# Allegro board ESP32.brd
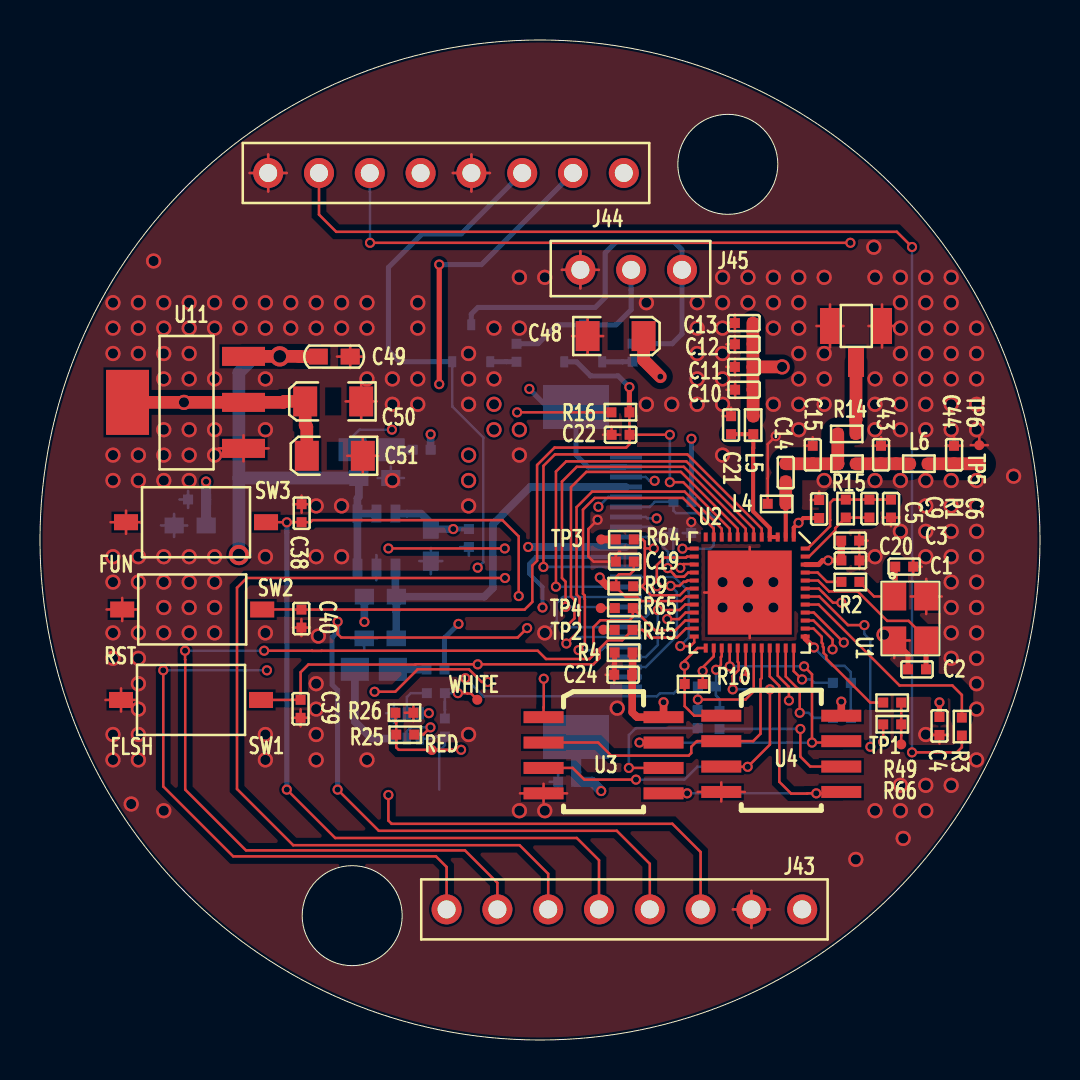
[diagram p0: board, top side]
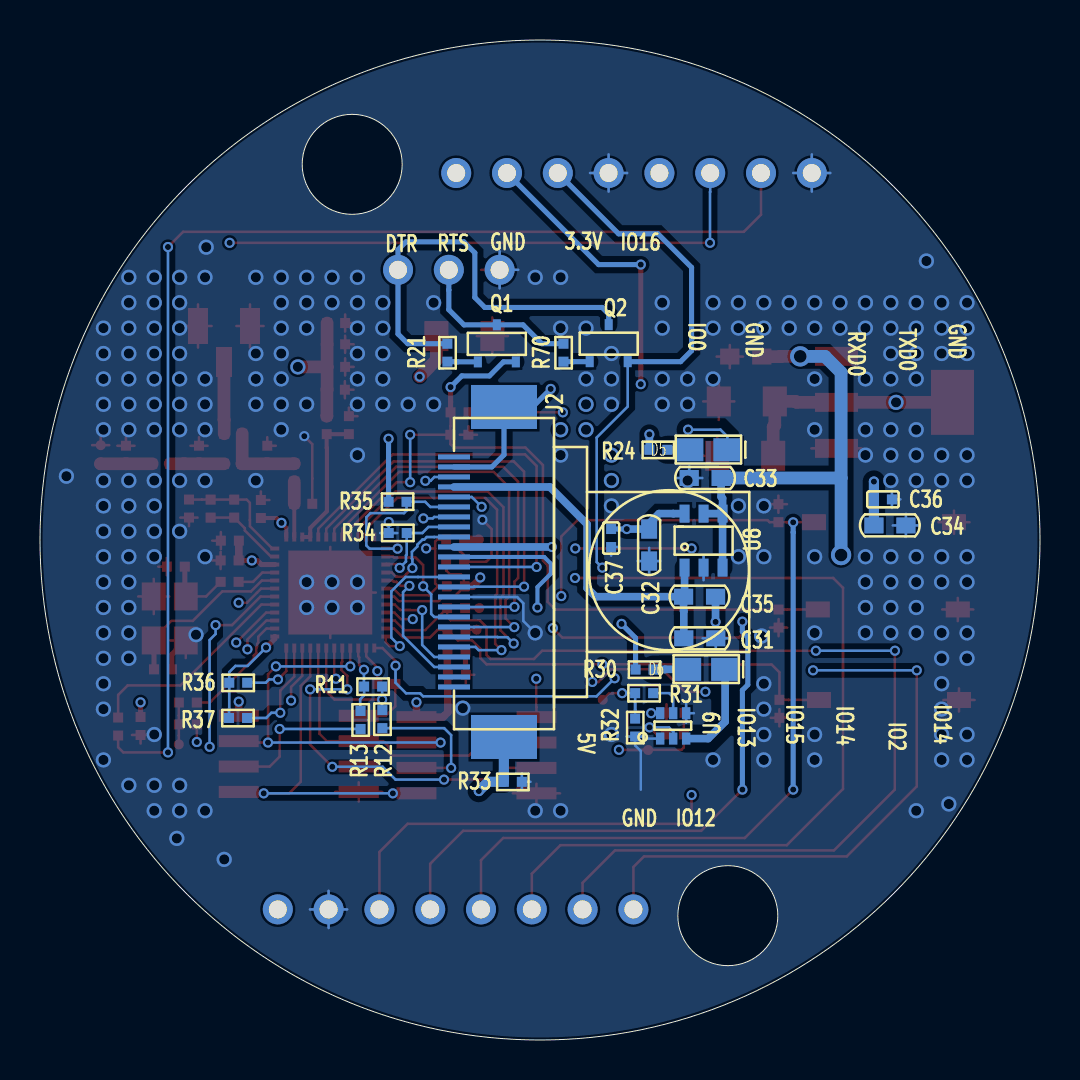
[diagram p1: board, bottom side, seen from below]

Outline 50 x 50 mm; copper layers: TOP, GND, SIG, BOTTOM. Coordinates in mm from the lower left corner of the outline.
Outline path: circle c15.61,6.22 r2.5 ; circle c25,25 r25 ; circle c34.39,43.78 r2.5

## Design rules (mm)
net group DTR: nets DTR N16908429
net group IO21: nets IO21 N16845223
net group IO22: nets IO22 N16845342
net group RTS: nets N16908427 RTS
net group RF: nets N16845246 N16845248 N16845297 N16845299 N16860839 N16860948 N16861170 N16861179 N16861214 N16861260 N16861530 N16861598 N16861944 N16863419 N16863538 N16884685 N16926532

## Placement (name value [footprint] x y rotation side)
C1  22pF/6.3V(10%)  [C0402]  42.76 23.67 0 top
C2  22pF/6.3V(10%)  [C0402]  44.3 18.53 180 top
C3  100pF/6.3V(10%)  [C0402]  40.06 24.97 0 top
C4  0.1uF/6.3V(10%)  [C0402]  44.97 16.15 270 top
C5  10nF/6.3V(10%)  [C0402]  42.55 27.02 270 top
C6  3.3nF/6.3V(10%)  [C0402]  41.47 26.12 90 top
C9  0.1uF/6.3V(10%)  [C0402]  38.96 26.1 90 top
C10  0.1uF/6.3V(10%)  [C0402]  35.66 32.51 180 top
C11  1uF/10V(20%)  [C0402]  35.65 33.65 180 top
C12  10uF/6.3V(20%)  [C0402]  35.65 34.79 180 top
C13  10uF/6.3V(20%)  [C0402]  35.65 35.85 180 top
C14  6.8pF  [C0402]  37.29 27.92 90 top
C15  2.4pF  [C0402]  38.64 29.71 270 top
C19  0.1uF/6.3V(10%)  [C0402]  29.69 23.92 180 top
C20  1uF/10V(20%)  [C0402]  40.07 23.98 0 top
C21  NC  [C0402]  34.55 30.29 90 top
C22  1uF/10V(20%)  [C0402]  29.48 30.26 180 top
C24  1uF/10V(20%)  [C0402]  29.61 18.26 180 top
C31  10uF/10V(20%)  [C0603]  16.21 20.08 0 bottom
C32  10uF/10V(20%)  [C0603]  19.54 23.95 90 bottom
C33  10uF/10V(20%)  [C0603]  17.54 28.1 180 bottom
C34  4.7uF/10V(20%)  [C0603]  8.3 25.73 180 bottom
C35  4.7uF/10V(20%)  [C0603]  17.82 22.17 180 bottom
C36  0.1uF/16V(10%)  [C0402]  8.3 27.03 180 bottom
C37  1uF/10V(20%)  [C0402]  21.44 25.55 270 bottom
C38  0.1uF/16V(10%)  [C0402]  13.08 26.79 270 top
C39  0.1uF/16V(10%)  [C0402]  13.03 16.11 90 top
C40  0.1uF/16V(10%)  [C0402]  13.07 20.62 90 top
C43  1.0pF  [C0402]  42.05 29.71 270 top
C44  1.5pF  [C0402]  45.7 29.71 270 top
C48  47uF/6.3V(20%)  [C1206]  30.18 35.2 0 top
C49  10uF/16V  [C0603]  13.91 34.17 0 top
C50  22uF/16V  [C1206]  13.26 31.93 180 top
C51  10uF/16V  [C1206]  13.34 29.21 180 top
D5  RED LED  [LED0805]  17.53 29.51 180 bottom
D6  WHITE LED  [LED0805]  17.64 18.53 180 bottom
J2  FFC_24P_0P5  [OV9650FSL_PCB]  29.3 29.15 90 bottom
J39  IPEX(NC)  [ECT8180001581]  40.8 33.9 0 top
J43  -  [CON8]  20.33 6.53 0 top
J44  -  [CON8]  11.41 43.35 0 top
J45  CON3  [CON_2_54_3P]  27.02 38.51 0 top
L4  2.4nH  [R0402]  37.29 26.81 180 top
L5  2.0nH  [R0402]  35.67 30.29 90 top
L6  2.0nH  [R0402]  43.49 28.81 0 top
Q1  S8050(NPN)  [SOT23-3]  27.16 35.76 180 bottom
Q2  S8050(NPN)  [SOT23-3]  21.56 35.77 180 bottom
R1  20K(5%)  [R0402]  40.29 26.12 90 top
R2  51R(5%)  [R0402]  40.97 22.91 180 top
R3  499R(1%)  [R0402]  46.09 16.12 270 top
R4  2K(5%)(NC)  [R0402]  29.63 19.37 180 top
R9  10K(1%)(NC)  [R0402]  28.76 22.69 0 top
R10  10K(1%)  [R0402]  33.13 17.8 180 top
R11  0R(5%)(NC)  [R0402]  32.89 17.67 0 bottom
R12  0R(5%)  [R0402]  32.88 16.49 270 bottom
R13  0R(5%)  [R0402]  33.97 16.45 270 bottom
R14  0R(5%)  [R0402]  40.79 30.31 180 top
R15  0R(5%)  [R0402]  39.9 28.81 0 top
R16  10K(1%)  [R0402]  28.57 31.38 0 top
R21  12K(1%)  [R0402]  29.63 34.82 270 bottom
R24  1K(1%)  [R0402]  18.63 29.51 0 bottom
R25  1K(1%)  [R0402]  18.71 15.27 180 top
R26  10K(1%)  [R0402]  17.77 16.36 0 top
R30  1K(1%)  [R0402]  19.32 18.52 0 bottom
R31  1K(1%)  [R0402]  19.34 17.34 0 bottom
R32  10K(1%)  [R0402]  20.24 16.07 270 bottom
R33  0R(5%)  [R0402]  25.91 12.91 0 bottom
R34  10K(1%)  [R0402]  32.56 25.35 180 bottom
R35  10K(1%)  [R0402]  32.57 26.91 180 bottom
R36  3.3K(5%)  [R0402]  39.64 17.86 0 bottom
R37  3.3K(5%)  [R0402]  39.65 16.1 0 bottom
R45  0R(5%)  [R0402]  28.73 20.5 0 top
R49  0R(5%)  [R0402]  43.06 16.87 180 top
R64  0R(5%)  [R0402]  28.79 25.03 0 top
R65  0R(5%)  [R0402]  28.74 21.6 0 top
R66  10K(1%)  [R0402]  42.16 15.78 0 top
R70  12K(1%)  [R0402]  23.83 34.82 270 bottom
RED  Red  [TP1]  19.59 14.5 0 top
SW1  SW PUSHBUTTON  [KEY_3X6]  4.05 17 0 top
SW2  SW PUSHBUTTON  [KEY_3X6]  4.11 21.53 0 top
SW3  SW PUSHBUTTON  [KEY_3X6]  4.3 25.89 0 top
TP1  Red  [TP1]  43.06 14.78 0 top
TP2  Red  [TP1]  28.17 20.51 0 top
TP3  Red  [TP1]  28.06 25.03 0 top
TP4  Red  [TP1]  28.04 21.6 0 top
TP5  Red  [TP1]  46.97 28.81 0 top
TP6  Red  [TP1]  46.96 29.74 0 top
U1  40MHz+/-10ppm  [CRY_3225]  44.31 22.18 270 top
U2  ESP32-D0WD  [AC108_QFN48]  37.69 25.15 270 top
U3  FLASH  [RZ7889]  28.26 11.12 0 top
U4  PSRAM  [RZ7889]  37.15 11.19 0 top
U8  RT9011-BM-PJ6  [SOT-23-6]  16.82 24.97 180 bottom
U9  SI1902CDL  [SOT363]  18.99 15.07 180 bottom
U11  TLV1117-33IDCY  [SOT223]  10.18 29.58 90 top
WHITE  Red  [TP1]  21.86 17.01 0 top

## Library data of the parts
C1-C6 C9-C15 C19-C22 C24 C31-C40 C43 C44 C48-C51 = CAP NP
D5 D6 = LED_6
J2 = CON24_4
J39 = IPEX_0
J43 J44 = CON8
J45 = CON3
L4-L6 = CHOKE
Q1 Q2 = NPN BCE
R1-R4 R9-R15 R45 R49 R64-R66 = RESISTOR
R16 = RESISTOR_0: signal model: DEFAULT_RESISTOR_10000OHM_1_2
R21 R24-R26 R30-R32 R34-R37 R70 = RESISTOR_0: signal model: DEFAULT_RESISTOR_200OHM_1_2
R33 = RESISTOR_0
RED TP1-TP6 WHITE = TEST POINT_0
SW1 = SW PUSHBUTTON_0
SW2 SW3 = SW PUSHBUTTON
U1 = X1_1
U2 = ESP8080_24
U3 = FLASH_3
U4 = PN18S32
U8 = NCP1117_3
U9 = D-NMOS_1
U11 = TLV1117-33IDCY

## Footprints (pads in the part's own frame, mm; a bottom-side part is the same pattern mirrored in y, then rotated)
AC108_QFN48
  rect 0.45x0.2 smd: 1(0,0) 2(0,-0.4) 3(0,-0.8) 4(0,-1.2) 5(0,-1.6) 6(0,-2) 7(0,-2.4) 8(0,-2.8) 9(0,-3.2) 10(0,-3.6) 11(0,-4) 12(0,-4.4) 25(5.55,-4.4) 26(5.55,-4) 27(5.55,-3.6) 28(5.55,-3.2) 29(5.55,-2.8) 30(5.55,-2.4) 31(5.55,-2) 32(5.55,-1.6) 33(5.55,-1.2) 34(5.55,-0.8) 35(5.55,-0.4) 36(5.55,0)
  rect 0.2x0.45 smd: 13(0.575,-4.975) 14(0.975,-4.975) 15(1.375,-4.975) 16(1.775,-4.975) 17(2.175,-4.975) 18(2.575,-4.975) 19(2.975,-4.975) 20(3.375,-4.975) 21(3.775,-4.975) 22(4.175,-4.975) 23(4.575,-4.975) 24(4.975,-4.975) 37(4.975,0.575) 38(4.575,0.575) 39(4.175,0.575) 40(3.775,0.575) 41(3.375,0.575) 42(2.975,0.575) 43(2.575,0.575) 44(2.175,0.575) 45(1.775,0.575) 46(1.375,0.575) 47(0.975,0.575) 48(0.575,0.575)
  rect 4.2x4.2 smd: 49(2.775,-2.2)
C0402
  rect 0.5x0.5 smd: 1(0,0) 2(0.9,0)
C0603
  rect 0.96x0.8 smd: 1(0,0) 2(1.6,0)
C1206
  rect 1.2x1.5 smd: 1(0,0) 2(-2.8,0)
CON8
  round 1.5 hole 0.9: 1(0,0) 2(2.54,0) 3(5.08,0) 4(7.62,0) 5(10.16,0) 6(12.7,0) 7(15.24,0) 8(17.78,0)
CON_2_54_3P
  round 1.5 hole 0.9: 1(0,0) 2(2.54,0) 3(5.08,0)
CRY_3225
  rect 1.4x1.2 smd: 1(0,-1.6) 2(2.2,-1.6) 3(2.2,0) 4(0,0)
ECT8180001581
  rect 0.8x1.5 smd: 1(0,0)
  rect 1x1.8 smd: 2(-1.3,1.8) 3(1.3,1.8)
KEY_3X6
  rect 1.2x0.8 smd: 1(0,0) 2(7,0)
LED0805
  rect 1.4x1.15 smd: 1(0,0) 2(1.9,0)
OV9650FSL_PCB
  rect 0.25x1.6 smd: 1(0,0) 2(-0.5,0) 3(-1,0) 4(-1.5,0) 5(-2,0) 6(-2.5,0) 7(-3,0) 8(-3.5,0) 9(-4,0) 10(-4.5,0) 11(-5,0) 12(-5.5,0) 13(-6,0) 14(-6.5,0) 15(-7,0) 16(-7.5,0) 17(-8,0) 18(-8.5,0) 19(-9,0) 20(-9.5,0) 21(-10,0) 22(-10.5,0) 23(-11,0) 24(-11.5,0)
  rect 2.2x3.3 smd: 25(-14,-2.5) 26(2.5,-2.5)
R0402
  rect 0.5x0.5 smd: 1(0,0) 2(0.9,0)
RZ7889
  rect 2x0.6 smd: 1(-3.082,5.025) 2(-3.082,3.755) 3(-3.082,2.485) 4(-3.082,1.215) 5(2.918,1.215) 6(2.918,2.485) 7(2.918,3.755) 8(2.918,5.025)
SOT23-3
  rect 0.4x0.55 smd: 1(-0.95,-1.85) 2(0.95,-1.85) 3(0,0)
SOT223
  rect 0.95x2.15 smd: 1(0,0) 2(2.3,0) 3(4.6,0)
  rect 3.25x2.15 smd: 4(2.3,5.8)
SOT363
  rect 0.42x0.6 smd: 1(0,0) 2(0.65,0) 3(1.3,0) 4(1.3,1.27) 5(0.65,1.27) 6(0,1.27)
SOT-23-6
  rect 0.5x0.9 smd: 1(-0.95,-1.35) 2(0,-1.35) 3(0.95,-1.35) 4(0.95,1.35) 5(0,1.35) 6(-0.95,1.35)
TP1
  round 0.5 smd: 1(0,0)

## Nets
AGND: C35.2 J2.2(AGND) J2.25(GND#25) J2.26(GND#26) R33.2
AVDD_2V8: C31.2 C35.1 J2.4(AVDD) U8.1(VOUT2)
DVDD_1V3: C32.2 C37.1 J2.10(DVDD) U8.6(VOUT1)
GND: C1.2 C2.2 C3.2 C4.2 C5.2 C9.2 C10.2 C11.2 C12.2 C13.2 C15.1 C19.2 C20.2 C21.2 C22.2 C24.2 C31.1 C32.1 C33.1 C34.2 C36.2 C37.2 C38.1 C39.1 C40.1 C43.1 C44.1 C48.2 C49.2 C50.2 C51.2 J2.15(DGND) J39.2(GND1) J39.3(GND2) J43.7 J44.1 J44.5 J45.1 L4.2 R4.2 R26.2 R32.2 R33.1 R34.1 SW1.1 SW2.1 SW3.1 TP6.1 U1.2(GND#2) U1.4(GND#4) U2.49(GND) U3.4(GND) U4.4(VSS) U8.2(GND) U9.1(S1) U9.4(S2) U11.1(ADJ/GND)
VBUS: C33.2 C49.1 J43.8 U8.3(EN2) U8.4(EN1) U8.5(VIN) U11.3(INPUT)
VDD_SDIO: C24.1 R4.1 R10.1 U2.26(VDD_SDIO) U3.8(VCC) U4.8(VDD)
CAM_RESET: J2.6(RESET) R35.2 U2.13(32K_XN)
DOVDD_3V3: C3.1 C4.1 C9.1 C10.1 C11.1 C12.1 C13.1 C19.1 C20.1 C34.1 C36.1 C48.1 C50.1 C51.1 J2.11(DOVDD) J44.8 L5.2 R9.1 R16.1 R24.2 R30.2 R35.1 R36.2 R37.2 R66.1 U2.1(VDDA#1) U2.19(VDD3P3_RTC) U2.37(VDD3P3_CPU) U2.43(VDDA#43) U2.46(VDDA#46) U11.2(OUTPUT#2) U11.4(OUTPUT#4)
DTR: J45.3 Q2.3(E) R21.1
DVP_HREF: J2.9(HREF) U2.16(GPIO27)
DVP_PCLK: J2.17(PCLK) U2.14(GPIO25)
DVP_VSYNC: J2.7(VSYNC) U2.34(GPIO5)
DVP_Y2: J2.19(Y2) U2.10(VDET_1)
DVP_Y3: J2.21(Y3) J43.5 U2.20(MTCK)
DVP_Y4: J2.22(Y4) J43.3 U2.17(MTMS)
DVP_Y5: J2.20(Y5) U2.11(VDET_2)
DVP_Y6: J2.18(Y6) U2.8(SENSOR_VN)
DVP_Y7: J2.16(Y7) U2.7(SENSOR_CAPN)
DVP_Y8: J2.14(Y8) U2.6(SENSOR_CAPP)
DVP_Y9: J2.12(Y9) U2.5(SENSOR_VP)
EN: C22.1 C40.2 Q1.2(C) R16.2 SW2.2 U2.9(CHIP_PU)
FLASH_CLK: R12.2 U3.6(CLK)
I2C_SCL: J2.5(SCL) R36.1 U2.36(GPIO23)
I2C_SDA: J2.3(SDA) R37.1 U2.35(GPIO18)
IO0: C39.2 J44.6 Q2.2(C) R45.2 SW1.2 U2.23(GPIO0)
IO2: J43.2 R65.2 U2.22(GPIO2)
IO4: J2.13(XCLK) J43.1 U2.24(GPIO4)
IO12: J43.6 R9.2 R64.2 U2.18(MTDI)
IO15: C38.2 J43.4 SW3.2 U2.21(MTDO)
IO16: J44.7 R10.2 U2.25(GPIO16) U4.1(CS#)
IO17: R11.2 R13.1 U2.27(GPIO17)
IO19: R49.2 U2.38(GPIO19)
IO21: R25.2 R26.1 RED.1 U2.42(GPIO21)
IO22: R31.2 R32.1 U2.39(GPIO22) WHITE.1
IO32: U2.12(32K_XP)
PWDN: J2.8(PWDN) R34.2 U2.15(GPIO26)
RTS: J45.2 Q1.3(E) R70.1
RXD0: J44.3 U2.40(U0RXD)
SCK/CLK: R11.1 R12.1 U2.31(SD_CLK)
SCS/CMD: U2.30(SD_CMD) U3.1(/CS)
SDI/SD1: U2.33(SD_DATA_1) U3.5(DI) U4.5(SI/SIO0)
SDO/SD0: U2.32(SD_DATA_0) U3.2(DO) U4.2(SO/SIO1)
SHD/SD2: U2.28(SD_DATA_2) U3.7(/HOLD) U4.7(SIO3)
SPI_CLK: R45.1 TP2.1
SPI_CS: R49.1 R66.2 TP1.1
SPI_DATAIN: R65.1 TP4.1
SPI_DATAOUT: R64.1 TP3.1
SRAM_CLK: R13.2 U4.6(SCLK)
SWP/SD3: U2.29(SD_DATA_3) U3.3(/WP) U4.3(SIO2)
TXD0: J44.2 R3.2
N16845223: R25.1 U9.2(G1)
N16845246: D5.2(CATHODE) U9.6(D1)
N16845248: D5.1(ANODE) R24.1
N16845297: D6.2(CATHODE) U9.3(D2)
N16845299: D6.1(ANODE) R30.1
N16845342: R31.1 U9.5(G2)
N16860839: C5.1 C6.2 R1.2 U2.48(CAP1)
N16860948: C21.1 L5.1 U2.3(VDD3P3#3) U2.4(VDD3P3#4)
N16861170: C14.2 C15.2 R14.2 R15.1
N16861179: C2.1 U1.3(XOUT) U2.44(XTAL_N)
N16861214: C1.1 R2.1 U1.1(XIN)
N16861260: C6.1 R1.1 U2.47(CAP2)
N16861530: R3.1 U2.41(U0TXD)
N16861598: R2.2 U2.45(XTAL_P)
N16861944: J39.1(RF) R14.1
N16863419: C43.2 L6.1 R15.2
N16863538: C44.2 L6.2 TP5.1
N16884685: C14.1 L4.1 U2.2(LNA_IN)
N16908427: Q2.1(B) R70.2
N16908429: Q1.1(B) R21.2
N16926532: J44.4

Pads without a net: J2 1 23 24

## Via types
v1: diameter 0.508, hole 0.305, TOP to BOTTOM, 100 vias
v2: diameter 1.016, hole 0.635, TOP to BOTTOM, 2 vias
v3: diameter 0.762, hole 0.508, TOP to BOTTOM, 224 vias

## Routing (per net, layer and track width the routed paths; a pad name or vN(x,y) marks a point on that pad's centre or on a via; arc(x,y) is an arc through that point)
AGND: length 14.6
  BOTTOM w0.254: J2.2 27.41,28.65 26.8,29.26 J2.26 25.37,31.65 v1(24.47,32.55) ; J2.25 26.8,13.42 26.81,13.41
  BOTTOM w0.381: C35.2 v1(16.22,20.91)
  BOTTOM w0.508: 26.8,15.18 26.81,15.17 R33.2 27.6,12.91 v1(28.06,12.45)
  vias: v3(21.43,29.24) v3(21.43,27.97) v3(22.7,31.78) v3(22.7,30.51) v3(23.97,30.51)
AVDD_2V8: length 19.2
  BOTTOM w0.381: J2.4 24.51,27.65 22.65,25.79 22.65,22.6 22.21,22.17 C35.1 ; C35.1 17.82,21.45 17.81,21.44 C31.2 ; C35.1 17.77,22.22 U8.1
DVDD_1V3: length 13.2
  SIG w0.508: 21.76,25.55 v1(20.66,25.55)
  SIG w0.635: v1(24.41,24.65) 23.51,25.55 21.76,25.55
  BOTTOM w0.254: C37.1 20.66,25.55 v1(20.66,25.55)
  BOTTOM w0.381: J2.10 v1(24.41,24.65) ; U8.6 18.34,26.32 18.34,26.32 19.05,26.32 19.54,25.83 C32.2 v1(20.66,25.55)
GND: length 157.2
  TOP w0.127: 34.75,34.36 C12.2 ; C12.2 34.75,35.21 ; C12.2 34.32,34.79 ; 39.5,34.62 J39.2 ; J39.2 39.5,36.78 ; J39.2 38.82,35.7 ; J39.2 40.18,35.7 ; C10.2 34.76,32.94 ; C10.2 34.76,32.09 ; C10.2 34.33,32.51 ; C3.2 40.96,25.4 ; C3.2 40.96,24.54 ; C3.2 41.39,24.97 ; C44.1 46.13,29.71 ; C44.1 45.27,29.71 ; C44.1 45.7,30.14 ; 18.67,15.93 R26.2 ; R26.2 18.24,16.36 ; R26.2 18.67,16.79 ; 27.38,34.27 C48.2 ; C48.2 27.38,36.12 ; C48.2 28.16,35.2 ; C48.2 26.6,35.2 ; C51.2 16.92,29.21 ; C51.2 16.14,28.28 ; C51.2 16.14,30.14 ; C51.2 15.36,29.21 ; J44.1 12.34,43.35 ; J44.1 11.41,44.28 ; J44.1 11.41,42.42 ; J44.1 10.48,43.35 ; TP6.1 46.96,30.17 ; TP6.1 46.54,29.74 ; TP6.1 47.39,29.74 ; L4.2 36.39,29.79 v1(36.79,30.19) ; 32.89,12.4 U4.4 ; U4.4 34.06,11.92 ; U4.4 34.06,12.88 ; U4.4 35.24,12.4 ; 15.28,31.93 C50.2 ; C50.2 16.06,31 ; C50.2 16.84,31.93 ; C50.2 16.06,32.86 ; C5.2 42.98,26.12 ; C5.2 42.12,26.12 ; C5.2 42.55,25.69 ; U2.49 35.49,24.65 ; U2.49 33.21,22.37 ; U2.49 35.49,20.1 ; v1(27.88,26.01) 27.42,25.55 27.42,24.18 27.68,23.92 C19.2 28.79,24.24 28.96,24.41 29.01,24.41 ; C13.2 34.75,36.27 ; C13.2 34.32,35.85 ; C13.2 34.75,35.42 ; SW1.1 4.05,17.58 ; SW1.1 4.05,16.42 ; SW1.1 3.27,17 ; SW1.1 4.83,17 ; 38.21,29.71 C15.1 38.64,30.14 ; C20.2 41.4,23.98 ; C20.2 40.97,24.41 ; C20.2 40.97,23.55 ; 43.53,22.18 U1.4 ; U1.4 44.31,21.3 ; U1.4 45.09,22.18 ; U1.4 44.31,23.05 ; U3.4 25.18,12.81 ; U3.4 26.36,12.33 ; U3.4 25.18,11.85 ; U3.4 24,12.33 ; 34.64,6.53 J43.7 ; J43.7 35.57,7.46 ; J43.7 36.5,6.53 ; J43.7 35.57,5.6 ; C43.1 42.48,29.71 ; C43.1 41.62,29.71 ; C43.1 42.05,30.14 ; 10.18,28.93 U11.1 ; U11.1 8.92,29.58 ; U11.1 11.43,29.58 ; U11.1 10.18,30.23 ; 26.09,38.51 J45.1 ; J45.1 27.95,38.51 ; J45.1 27.02,37.58 ; J45.1 27.02,39.44 ; 44.54,15.25 C4.2 ; C4.2 45.4,15.25 ; C4.2 44.97,14.82 ; SW2.1 4.89,21.53 ; SW2.1 4.11,20.95 ; SW2.1 4.11,22.1 ; SW2.1 3.33,21.53 ; C38.1 13.51,26.79 ; C38.1 12.65,26.79 ; C38.1 13.08,26.36 ; C38.1 13.08,27.22 ; SW3.1 4.3,26.47 ; SW3.1 3.52,25.89 ; SW3.1 4.3,25.31 ; SW3.1 5.08,25.89 ; 34.75,33.23 C11.2 ; C11.2 34.75,34.08 ; C11.2 34.32,33.65 ; C1.2 44.09,23.67 ; C1.2 43.66,23.24 ; C1.2 43.66,24.1 ; J39.3 42.1,36.78 ; J39.3 42.1,34.62 ; J39.3 42.78,35.7 ; J39.3 41.42,35.7 ; C39.1 13.46,16.11 ; C39.1 12.6,16.11 ; C39.1 13.03,16.54 ; C39.1 13.03,15.68 ; J44.5 22.5,43.35 ; J44.5 21.57,42.42 ; J44.5 20.64,43.35 ; J44.5 21.57,44.28 ; 43.49,19.98 U1.2 42.71,19.1 ; 34.55,31.62 C21.2 34.13,31.19 ; 38.53,27 C9.2 38.96,27.43 ; 28.28,18.26 C24.2 28.71,17.84 ; 13.07,20.19 C40.1 ; C40.1 13.5,20.62 ; C40.1 12.64,20.62 ; C40.1 13.07,21.05 ; C22.2 28.58,30.69 ; C22.2 29.01,30.26 ; C22.2 28.15,30.26 ; C49.2 16.17,34.17 ; C49.2 15.51,33.59 ; C49.2 15.51,34.75 ; C49.2 14.85,34.17
  TOP w0.254: R4.2 28.73,18.79 28.71,18.77 C24.2 ; C2.2 43.4,19.29 U1.2
  GND w0.127: J45.1 27.95,38.51 ; J45.1 27.02,39.44 ; J45.1 26.09,38.51 ; J45.1 27.02,37.58 ; 20.64,43.35 J44.5 ; J44.5 21.57,44.28 ; J44.5 21.57,42.42 ; J44.5 22.5,43.35 ; J43.7 36.5,6.53 ; J43.7 35.57,7.46 ; J43.7 34.64,6.53 ; J43.7 35.57,5.6 ; J44.1 12.34,43.35 ; J44.1 11.41,44.28 ; J44.1 11.41,42.42 ; J44.1 10.48,43.35
  BOTTOM w0.127: C33.1 17.54,28.68 ; C33.1 16.88,28.1 ; C33.1 18.2,28.1 ; J2.15 26.14,22.15 25.83,21.84 25.83,20.95 v3(25.24,20.35) ; 21.44,24.22 C37.2 21.02,24.65 ; C34.2 6.7,26.31 ; C34.2 6.05,25.73 ; C34.2 7.36,25.73 ; C34.2 6.7,25.15 ; 26.09,38.51 J45.1 ; J45.1 27.02,39.44 ; J45.1 27.02,37.58 ; 25.91,12.48 R33.1 ; R33.1 25.91,13.34 ; R33.1 25.48,12.91 ; 19.96,12.52 19.96,14.45 20.24,14.73 R32.2 ; J44.5 22.5,43.35 ; J44.5 20.64,43.35 ; J44.5 21.57,42.42 ; J44.5 21.57,44.28 ; v1(32.56,25.9) R34.1 ; R34.1 32.99,25.35 ; R34.1 32.13,25.35 ; R32.2 20.67,15.17 ; R32.2 19.8,15.17 19.7,15.07 U9.1 ; R32.2 19.82,15.17 ; 17.3,16.34 U9.4 ; U9.4 17.69,16.82 ; U9.4 17.69,15.86 ; 15.55,20.08 C31.1 ; C31.1 16.87,20.08 ; C31.1 16.21,19.51 ; 19.54,23.29 C32.1 ; C32.1 19.54,24.61 ; C32.1 18.96,23.95 ; C32.1 20.12,23.95 ; J44.1 11.41,44.28 ; J44.1 12.34,43.35 ; J44.1 10.48,43.35 ; J44.1 11.41,42.42 ; 7.4,26.6 C36.2 ; C36.2 7.4,27.46 ; C36.2 6.98,27.03 ; J43.7 35.57,7.46 ; J43.7 35.57,5.6 ; J43.7 36.5,6.53 ; J43.7 34.64,6.53 ; 16.82,22.99 U8.2 16.82,24.25
  vias: v3(3.65,36.86) v3(3.65,35.59) v3(3.65,34.32) v3(3.65,29.24) v3(3.65,27.97) v3(3.65,24.16) v3(3.65,22.89) v3(3.65,20.35) v3(3.65,19.08) v3(3.65,15.27) v3(3.65,14) v3(4.56,11.8) v3(4.92,36.86) v3(4.92,35.59) v3(4.92,34.32) v3(4.92,29.24) v3(4.92,27.97) v3(4.92,24.16) v3(4.92,22.89) v3(4.92,20.35) v3(4.92,19.08) v3(4.92,17.81) v3(4.92,16.54) v3(4.92,15.27) v3(4.92,14) v3(5.68,38.95) v3(6.19,36.86) v3(6.19,35.59) v3(6.19,34.32) v3(6.19,33.05) v3(6.19,30.51) v3(6.19,29.24) v3(6.19,27.97) v3(6.19,24.16) v3(6.19,22.89) v3(6.19,21.62) v3(6.19,20.35) v3(6.19,11.46) v3(7.46,36.86) v3(7.46,35.59) v3(7.46,34.32) v3(7.46,33.05) v3(7.46,30.51) v3(7.46,29.24) v3(7.46,27.97) v3(7.46,24.16) v3(7.46,22.89) v3(7.46,21.62) v3(7.46,20.35) v3(8.73,36.86) v3(8.73,35.59) v3(8.73,33.05) v3(8.73,30.51) v3(8.73,29.24) v3(8.73,24.16) v3(8.73,22.89) v3(8.73,21.62) v3(8.73,20.35) v3(10,36.86) v3(10,35.59) v3(11.27,36.86) v3(11.27,35.59) v3(11.27,33.05) v3(11.27,30.51) v3(11.27,24.16) v3(11.27,20.35) v3(11.27,15.27) v3(11.27,14) v3(12.54,36.86) v3(12.54,35.59) v3(13.81,36.86) v3(13.81,35.59) v3(13.81,26.7) v3(13.81,24.16) v3(13.81,17.81) v3(13.81,16.54) v3(13.81,15.27) v3(13.81,14) v3(13.92,20.2) v3(15.08,36.86) v3(15.08,35.59) v3(15.08,26.7) v3(15.08,24.16) v3(16.35,36.86) v3(16.35,35.59) v3(16.35,33.05) v3(16.35,14) v3(17.62,33.05) v3(17.62,31.78) v3(17.62,27.97) v3(18.89,36.86) v3(18.89,35.59) v3(18.89,33.05) v3(18.89,31.78) v3(21.43,34.32) v3(21.43,33.05) v3(21.43,31.78) v3(21.43,26.7) v3(21.43,15.27) v3(22.7,35.59) v3(22.7,33.05) v3(23.97,38.13) v3(23.97,35.59) v3(23.97,29.24) v3(23.97,11.46) v3(25.24,38.13) v3(25.24,11.46) v3(28.86,16.59) v3(30.32,36.86) v3(30.32,31.78) v3(31.59,31.78) v3(32.86,36.86) v3(32.86,35.59) v3(32.86,34.32) v3(32.86,33.05) v3(32.86,31.78) v3(34.13,38.13) v3(34.13,36.86) v3(34.13,35.59) v3(34.13,34.32) v3(34.13,33.05) v3(34.13,31.78) v3(34.13,29.24) v3(34.13,22.89) v3(34.13,21.62) v3(35.4,38.13) v3(35.4,36.86) v3(35.4,22.89) v3(35.4,21.62) v3(36.67,38.13) v3(36.67,36.86) v3(36.67,35.59) v3(36.67,31.78) v3(36.67,22.89) v3(36.67,21.62) v3(37.94,38.13) v3(37.94,36.86) v3(37.94,35.59) v3(37.94,34.32) v3(37.94,33.05) v3(37.94,31.78) v3(37.94,30.51) v3(39.21,38.13) v3(39.21,34.32) v3(39.21,33.05) v3(39.21,31.78) v3(39.21,27.97) v3(40.79,9.03) v3(41.69,39.64) v3(41.75,38.13) v3(41.75,33.05) v3(41.75,31.78) v3(41.75,30.51) v3(41.75,27.97) v3(41.75,24.16) v3(41.75,11.46) v3(42.2,20.26) v3(43.02,38.13) v3(43.02,36.86) v3(43.02,35.59) v3(43.02,34.32) v3(43.02,33.05) v3(43.02,31.78) v3(43.02,30.51) v3(43.02,27.97) v3(43.02,25.43) v3(43.02,12.73) v3(43.02,11.46) v3(43.16,10.08) v3(44.29,38.13) v3(44.29,36.86) v3(44.29,35.59) v3(44.29,34.32) v3(44.29,33.05) v3(44.29,31.78) v3(44.29,30.51) v3(44.29,27.97) v3(44.29,26.7) v3(44.29,25.43) v3(44.29,24.16) v3(44.29,15.27) v3(44.29,12.73) v3(44.29,11.46) v3(45.56,38.13) v3(45.56,36.86) v3(45.56,35.59) v3(45.56,34.32) v3(45.56,33.05) v3(45.56,31.78) v3(45.56,30.51) v3(45.56,27.97) v3(45.56,26.7) v3(45.56,25.43) v3(45.56,24.16) v3(45.56,22.89) v3(45.56,21.62) v3(45.56,20.35) v3(45.56,19.08) v3(45.56,12.73) v3(46.83,35.59) v3(46.83,34.32) v3(46.83,33.05) v3(46.83,31.78) v3(46.83,30.51) v3(46.83,27.97) v3(46.83,26.7) v3(46.83,25.43) v3(46.83,24.16) v3(46.83,22.89) v3(46.83,21.62) v3(46.83,20.35) v3(46.83,19.08) v3(46.83,17.81) v3(46.83,16.54) v3(46.83,14) v3(48.68,28.19)
VBUS: length 72.2
  TOP w0.635: C49.1 12.99,34.17 12.97,34.18 v2(11.99,34.18) U11.3
  SIG w0.635: v2(9.95,24.25) 9.95,18.76 8.61,17.43 8.61,11.87 10.31,10.16 36,10.16 38.11,8.05 J43.8
  BOTTOM w0.381: U8.5 U8.4 ; U8.4 15.87,27.09 15.94,27.16 C33.2 ; U8.4 U8.3
  BOTTOM w0.635: 9.95,28.11 9.95,33.37 10.75,34.18 v2(11.99,34.18) ; 9.95,28.11 9.96,28.1 C33.2 ; 9.95,28.11 v2(9.95,24.25)
VDD_SDIO: length 24.1
  TOP w0.127: R10.1 v1(33.13,18.45) 33.13,18.63 33.69,19.18 U2.26
  TOP w0.381: R4.1 29.63,18.28 C24.1 29.61,16.38 29.79,16.2 29.8,16.2 29.86,16.14 U3.8 v1(31.18,16.89) ; U4.8 v1(40.06,16.92)
  SIG w0.508: v1(40.06,16.92) 40.06,14.61 39.43,13.97 36.94,13.97 35.61,15.3 31.64,15.3 31.18,15.77 v1(31.18,16.89) 32.29,18 32.68,18 v1(33.13,18.45)
CAM_RESET: length 8.7
  TOP w0.127: v1(32.12,24.57) 32.71,24.57 U2.13
  BOTTOM w0.127: J2.6 30.48,26.65 30.74,26.91 R35.2 31.67,26.47 31.8,26.34 33.48,26.34 33.68,26.14 33.68,24.73 33.52,24.57 v1(32.12,24.57)
DOVDD_3V3: length 74.1
  TOP w0.127: U2.19 32.3,22.17 32.07,21.95 30.06,21.95 29.85,22.16 29.29,22.16 R9.1 28.81,22.74 28.81,23.15 28.95,23.29 29.5,23.29 29.69,23.48 C19.1 ; R66.1 v1(42.16,14.9) ; U2.43 38.94,22.57 39.15,22.36 39.65,21.87 v1(40.07,21.87) ; R16.1 v1(23.86,31.38)
  TOP w0.203: C9.1 38.17,26.1 v1(37.93,25.86) 37.69,25.62 U2.1
  TOP w0.254: C20.1 v1(39.41,23.98) 39.14,23.98 38.93,23.77 U2.46 ; v1(38.7,19.62) 38.26,20.06 U2.37 ; C4.1 v1(44.97,16.88)
  TOP w0.381: C20.1 40.06,23.99 C3.1 ; v1(27.99,23.13) 27.99,23.07 28.37,22.69 R9.1
  TOP w0.635: v1(31.02,33.16) 30.18,34 C48.1 ; C11.1 35.65,32.52 C10.1 35.66,31.2 L5.2 ; C11.1 C12.1 C13.1 ; C11.1 v3(37.11,33.65) ; U11.4 v3(7.2,31.88) U11.2 12.17,31.88 12.22,31.93 C50.1 13.26,30.74 13.34,30.66 C51.1
  SIG w0.127: J44.8 29.19,44.28 ; J44.8 28.26,43.35 ; J44.8 30.12,43.35 ; J44.8 29.19,42.42
  SIG w0.635: v1(37.93,25.86) 38.79,25.86 39.41,25.24 v1(39.41,23.98) 39.41,22.52 v1(40.07,21.87) 38.7,20.49 v1(38.7,19.62)
  BOTTOM w0.127: R37.2 40.55,16.54 40.54,16.55 R36.2 40.54,18.39 40.23,18.7 39.62,18.7 v1(38.7,19.62)
  BOTTOM w0.203: v1(25.13,21.63) 25.13,22.65 24.46,23.32 24.46,23.82 24.79,24.15 J2.11
  BOTTOM w0.254: R30.2 20.22,20.1 v1(20.92,20.8) ; R35.1 v1(32.57,30.06)
  BOTTOM w0.381: R24.2 v1(19.53,30.28)
  BOTTOM w0.508: v1(8.3,27.92) C36.1 C34.1
DTR: length 20.9
  BOTTOM w0.254: Q2.3 21.56,36.3 21.9,36.63 27.76,36.63 28.26,37.13 28.26,39.36 28.81,39.91 31.7,39.91 32.1,39.51 J45.3 32.1,35.3 31.61,34.82 R21.1
DVP_HREF: length 4.9
  TOP w0.127: U2.16 32.41,23.37 32.2,23.16 32.17,23.16 32.17,23.16 31.8,23.16 31.7,23.26 31.7,23.28 v1(31.38,23.6)
  BOTTOM w0.127: J2.9 30.29,25.15 30.29,25.15 30.66,25.15 30.79,25.02 30.88,25.02 31.14,24.76 31.14,24.67 31.41,24.4 31.41,24.06 31.38,24.04 v1(31.38,23.6)
DVP_PCLK: length 5.9
  TOP w0.127: v1(30.84,22.69) 30.84,23.74 31.22,24.12 32.3,24.12 32.36,24.17 U2.14
  BOTTOM w0.127: J2.17 30.29,21.15 30.44,21.3 30.44,22.29 v1(30.84,22.69)
DVP_VSYNC: length 18.9
  TOP w0.127: U2.34 36.89,18.21 37.45,17.65 v1(37.45,16.97)
  SIG w0.127: v1(30.83,26.08) 31.15,26.39 34.55,26.39 37.45,23.5 v1(37.45,16.97)
  BOTTOM w0.127: v1(30.83,26.08) 30.36,26.08 30.29,26.15 J2.7
DVP_Y2: length 19
  TOP w0.127: U2.10 34.09,25.56 32.23,27.42 27.61,27.42 26.83,26.64 26.83,22.27 26.98,22.12 26.98,20.48 v1(26.32,19.82)
  BOTTOM w0.127: J2.19 27.13,20.15 27.11,20.14 26.63,20.14 v1(26.32,19.82)
DVP_Y3: length 50.8
  TOP w0.127: U2.20 32.26,21.77 31.99,21.5 31.5,21.5 31.49,21.5 v1(30.89,21.5) ; J43.5 30.49,8.81 28.84,10.46 16.94,10.46 v1(14.88,12.52) ; v1(24.36,20.59) 23.89,20.12 15.06,20.12 14.88,20.3 v1(14.88,20.92)
  SIG w0.127: v1(30.89,21.5) 30.17,21.5 29.76,21.09 24.85,21.09 v1(24.36,20.59)
  BOTTOM w0.127: J2.21 30.29,19.15 30.89,19.75 v1(30.89,21.5)
  BOTTOM w0.254: v1(14.88,20.92) 14.88,20.41 14.61,20.14 14.61,17.76 14.88,17.49 v1(14.88,12.52)
DVP_Y4: length 59.2
  TOP w0.127: v1(23.25,23.1) 10.34,23.1 9.85,22.61 9.85,12.55 12.66,9.74 23.98,9.74 25.41,8.31 J43.3 ; v1(31.53,22.71) 31.98,22.71 32.18,22.91 32.27,22.91 32.27,22.91 32.31,22.91 32.37,22.97 U2.17
  SIG w0.127: v1(23.25,23.1) 23.99,23.1 25.01,24.12 30.12,24.12 v1(31.53,22.71)
  BOTTOM w0.127: v1(31.53,22.71) 31.85,22.39 31.85,20.21 30.29,18.65 J2.22
DVP_Y5: length 17.5
  TOP w0.127: v1(26.93,19.49) 27.24,19.81 27.24,22.04 27.23,22.05 27.23,22.23 27.15,22.31 27.15,26.52 27.73,27.1 32.15,27.1 33.69,25.56 U2.11
  BOTTOM w0.127: J2.20 29.3,19.65 28.23,19.65 28.07,19.49 v1(26.93,19.49)
DVP_Y6: length 20.5
  TOP w0.127: U2.8 34.89,25.56 32.05,28.41 27.31,28.41 26.55,27.64 26.55,22.18 26.72,22.01 26.72,21.08 v1(26.29,20.64)
  BOTTOM w0.127: v1(26.29,20.64) 28.3,20.64 28.31,20.65 J2.18
DVP_Y7: length 20.6
  TOP w0.127: U2.7 35.29,25.56 32.19,28.66 26.84,28.66 26.1,27.92 26.1,23.1 26.28,22.92 v1(26.28,21.66)
  BOTTOM w0.127: J2.16 26.98,21.65 26.98,21.66 v1(26.28,21.66)
DVP_Y8: length 21.2
  TOP w0.127: v1(25.8,22.67) 25.8,28.42 26.31,28.93 32.32,28.93 35.69,25.56 U2.6
  BOTTOM w0.127: J2.14 28.31,22.65 28.29,22.67 v1(25.8,22.67)
DVP_Y9: length 22.3
  TOP w0.127: U2.5 36.09,25.56 32.37,29.28 25.75,29.28 25.17,28.71 v1(25.17,23.65)
  BOTTOM w0.127: J2.12 v1(25.17,23.65)
EN: length 41.1
  TOP w0.127: R16.2 29.47,30.71 29.48,30.7 C22.1 ; v1(31.49,27.89) 32.16,27.89 34.49,25.56 U2.9 ; C22.1 v1(31.49,30.26) ; C22.1 29.48,29.79 29.31,29.62 25.73,29.62 24.85,28.75 24.85,23.96 24.62,23.73 24.62,21.91 24.23,21.52 C40.2 12.63,21.52 12.62,21.53 SW2.2
  TOP w0.254: v1(29.47,32.64) 29.47,31.89 R16.2
  BOTTOM w0.127: v1(31.49,27.89) v1(31.49,30.26)
  BOTTOM w0.254: Q1.2 26.83,33.91 27.53,33.2 28.91,33.2 v1(29.47,32.64)
FLASH_CLK: length 7
  TOP w0.127: U3.6 v1(29.44,13.6)
  BOTTOM w0.127: R12.2 29.79,15.59 29.44,15.24 v1(29.44,13.6)
I2C_SCL: length 22.3
  TOP w0.127: U2.36 37.69,18.44 v1(38.1,18.03)
  SIG w0.127: v1(27.92,26.66) 28.42,27.16 34.35,27.16 37.76,23.75 37.76,18.37 v1(38.1,18.03)
  BOTTOM w0.127: R36.1 38.71,17.86 38.55,18.03 v1(38.1,18.03) ; J2.5 28.41,27.15 v1(27.92,26.66)
I2C_SDA: length 24.9
  TOP w0.127: v1(37.99,16.36) 37.99,17.47 37.29,18.17 U2.35
  SIG w0.127: v1(37.99,16.36) 38.52,16.36 38.9,16.74 38.9,18.61 38.14,19.37 38.14,24.16 33.97,28.33 31.11,28.33 v1(30.73,27.96)
  BOTTOM w0.127: v1(30.73,27.96) 30.47,27.96 30.28,28.15 J2.3 ; v1(37.99,16.36) 38.43,16.36 38.69,16.1 R37.1
IO0: length 56.7
  TOP w0.127: U2.23 32.3,20.57 31.84,20.12 30.51,20.12 30.13,20.5 R45.2 29.11,19.98 28.4,19.98 27.99,19.57 27.99,19.1 27.67,18.78 v1(21.88,18.78) 21.88,18.79 18.78,18.79 18.76,18.77 13.42,18.77 13.03,18.39 C39.2 12.59,17.01 12.58,17 SW1.2
  SIG w0.127: v1(21.88,23.62) v1(21.88,18.78)
  BOTTOM w0.127: Q2.2 20.61,31.67 22.16,30.12 22.16,23.9 v1(21.88,23.62)
  BOTTOM w0.254: J44.6 21.07,40.31 19.1,40.31 17.42,38.63 17.42,34.47 17.97,33.92 Q2.2
IO2: length 54.2
  TOP w0.127: v1(11.21,19.46) 13.6,19.46 13.6,19.46 14.08,19.46 14.08,19.46 24.89,19.46 25.3,19.05 27.47,19.05 27.67,19.24 27.67,20.64 28.02,20.99 29.47,20.99 29.64,21.16 R65.2 30.74,20.49 31.78,20.49 32.26,20.97 U2.22 ; v1(7.25,19.46) 7.25,19.02 7.26,19.01 7.26,12.52 10.3,9.48 21.25,9.48 22.87,7.86 J43.2
  BOTTOM w0.127: v1(11.21,19.46) v1(7.25,19.46)
IO4: length 59.2
  TOP w0.127: v1(6.16,18.48) 6.16,12.68 9.66,9.18 19.8,9.18 20.33,8.65 J43.1 ; v1(22.38,17.9) 22.08,17.9 21.45,18.53 18.88,18.53 17.76,17.41 v1(16.73,17.41) ; v1(32.01,19.69) 32.52,19.69 32.71,19.88 U2.24
  SIG w0.127: v1(32.01,19.69) 30.03,19.69 28.88,18.54 22.58,18.54 22.38,18.35 v1(22.38,17.9) ; v1(16.73,17.41) 15.66,18.48 v1(11.35,18.48)
  BOTTOM w0.127: v1(32.01,19.69) 32.43,20.11 32.43,22.44 31.72,23.15 31.1,23.15 31.1,23.15 J2.13 ; v1(6.16,18.48) v1(11.35,18.48)
IO12: length 53.9
  TOP w0.127: R64.2 30.13,25.03 30.24,24.92 30.24,24.58 ; 30.1,22.69 R9.2 ; 30.1,22.69 30.55,22.24 31.99,22.24 32.33,22.57 U2.18 ; 30.1,22.69 30.24,22.83 30.24,24.58 ; 30.24,24.58 v1(30.69,24.58) ; v1(17.42,24.58) v1(23.24,24.58) ; J43.6 33.03,9.4 31.62,10.81 17.58,10.81 17.42,10.97 v1(17.42,12.25)
  SIG w0.127: v1(23.24,24.58) 23.7,24.11 24.64,24.11 25.72,25.19 30.53,25.19 30.69,25.02 v1(30.69,24.58)
  SIG w0.254: v1(17.42,12.25) 17.42,24.07 17.42,24.07 v1(17.42,24.58)
IO15: length 59
  TOP w0.127: 12.64,25.89 12.35,25.89 v1(12.34,25.88) ; 12.64,25.89 C38.2 13.52,25.89 13.62,25.99 23.12,25.99 23.94,25.18 v1(23.94,22.2) ; 12.64,25.89 12.64,25.89 SW3.2 ; U2.21 32.28,21.37 31.95,21.05 v1(31.36,21.05) ; J43.4 27.95,8.99 26.84,10.1 14.76,10.1 v1(12.34,12.52)
  SIG w0.127: v1(23.94,22.2) 30.92,22.2 31.36,21.76 v1(31.36,21.05)
  BOTTOM w0.254: v1(12.34,12.52) 12.34,25.38 12.34,25.38 v1(12.34,25.88)
IO16: length 48.1
  TOP w0.127: 32.23,18.95 R10.2 32.23,16.69 32.71,16.21 32.71,16.21 U4.1 ; 32.23,18.95 32.88,19.6 U2.25 ; 32.23,18.95 32.22,18.94 v1(32.22,18.71)
  TOP w0.254: v1(19.96,32.79) v1(19.96,38.77)
  SIG w0.127: v1(19.96,32.79) 19.96,32.35 20.14,32.17 20.14,19.21 v1(21.27,18.09)
  BOTTOM w0.127: v1(32.22,18.71) 32.22,17.86 31.69,17.33 30.99,17.33 30.84,17.18 22.17,17.18 v1(21.27,18.09)
  BOTTOM w0.254: v1(19.96,38.77) 22.07,38.77 J44.7
IO17: length 3.4
  TOP w0.127: v1(33.8,18.51) 34.04,18.75 34.04,19.14 34.09,19.18 U2.27
  BOTTOM w0.127: R13.1 33.99,16.47 33.99,17.03 33.79,17.23 R11.2 33.8,17.68 v1(33.8,18.51)
IO19: length 5.9
  TOP w0.127: R49.2 41.51,16.87 39.31,19.07 39.31,19.22 39.18,19.35 39.18,19.63 39.14,19.67 39.14,19.81 39.09,19.86 39.09,20.16 38.68,20.57 U2.38
IO21: length 40.4
  TOP w0.127: U2.42 38.97,22.17 40.4,20.75 v1(41.22,20.75) ; RED.1 20.6,14.5 20.61,14.51 ; 20.61,14.51 17.93,14.51 17.81,14.63 R25.2 17.81,15.88 17.77,15.92 R26.1 ; 20.61,14.51 v1(21.05,14.51)
  SIG w0.127: v1(21.05,14.51) 23.7,14.51 26.83,11.38 40.68,11.38 41.52,12.22 v1(41.52,14.66)
  BOTTOM w0.127: v1(41.52,14.66) 41.52,20 41.22,20.3 v1(41.22,20.75)
IO22: length 35.9
  TOP w0.127: U2.39 38.68,20.97 39.63,20.02 v1(39.63,19.53) ; v1(20.89,17.34) 21.36,17.34 21.38,17.32 21.55,17.32 WHITE.1
  SIG w0.127: v1(20.89,17.34) 21.51,17.34 27.19,11.67 40.04,11.67 40.86,12.49 40.86,18.3 v1(39.63,19.53)
  BOTTOM w0.127: 20.24,16.9 R31.2 v1(20.89,17.34) ; 20.24,16.9 20.24,16.51 20.24,16.51 ; 20.24,16.9 20.24,16.9 20.24,16.51 ; 20.24,16.51 R32.1
PWDN: length 5.2
  TOP w0.127: U2.15 32.69,23.8 32.17,23.8 32.02,23.64 v1(32.02,23.61)
  BOTTOM w0.127: v1(32.02,23.61) 31.7,23.92 31.7,24.23 31.66,24.27 R34.2 30.88,25.35 30.58,25.65 J2.8
RTS: length 8.4
  BOTTOM w0.254: J45.2 29.56,37.5 29.56,37.5 29.56,36.52 28.8,35.76 Q1.3 25.85,35.76 24.91,34.82 R70.1
RXD0: length 50.5
  TOP w0.127: v1(40.19,19.87) 38.69,21.37 U2.40 ; v1(40.52,39.86) v1(16.5,39.86)
  SIG w0.127: v1(40.19,19.87) 40.58,20.26 40.58,21.07 40.89,21.39 40.89,39.49 v1(40.52,39.86)
  BOTTOM w0.127: J44.3 16.49,42.41 16.5,42.4 v1(16.5,39.86)
SCK/CLK: length 6.3
  TOP w0.127: v1(32.89,17.02) 35.27,17.02 35.69,17.43 U2.31
  BOTTOM w0.127: R11.1 v1(32.89,17.02) 32.89,16.5 R12.1
SCS/CMD: length 15
  TOP w0.127: v1(25.19,18.06) 25.19,16.64 25.18,16.63 U3.1 ; U2.30 35.29,18.14 v1(35.2,18.06)
  SIG w0.127: v1(25.19,18.06) 29.05,18.06 30.21,19.22 34.92,19.22 35.2,18.94 v1(35.2,18.06)
SDI/SD1: length 17.9
  TOP w0.127: U4.5 39.99,12.33 v1(38.81,12.33) 38.37,12.33 38.36,12.32 37.56,12.32 36.97,12.91 36.97,17.7 36.49,18.18 U2.33 ; U3.5 v1(32.36,12.33)
  BOTTOM w0.127: v1(32.36,12.33) v1(38.81,12.33)
SDO/SD0: length 16.1
  TOP w0.127: U3.2 27.91,14.87 28.56,14.22 32.44,14.22 32.56,14.35 32.56,14.66 32.84,14.94 32.87,14.94 32.87,14.94 U4.2 35.66,14.94 36.03,15.31 36.03,18.03 36.09,18.09 U2.32
SHD/SD2: length 19.9
  TOP w0.127: v1(38.2,18.68) 38.6,18.29 v1(38.6,14.87) 39.99,14.87 U4.7 ; U3.7 v1(29.97,14.87) ; U2.28 v1(34.49,18.68)
  BOTTOM w0.127: v1(29.97,14.87) v1(38.6,14.87) ; v1(34.49,18.68) v1(38.2,18.68)
SPI_CLK: length 0.6
  TOP w0.127: R45.1 28.72,20.51 TP2.1 28.18,20.5
SPI_CS: length 2.1
  TOP w0.127: R49.1 43.06,16.22 R66.2 43.06,15.22 43.06,15.22 TP1.1
SPI_DATAIN: length 0.7
  TOP w0.127: R65.1 TP4.1
SPI_DATAOUT: length 0.7
  TOP w0.381: R64.1 TP3.1
SRAM_CLK: length 7.7
  TOP w0.127: v1(38.02,15.55) 38.02,14.17 38.51,13.67 U4.6
  BOTTOM w0.127: R13.2 v1(38.02,15.55)
SWP/SD3: length 20.4
  TOP w0.127: v1(34.63,17.53) 34.63,18.2 34.93,18.5 34.93,18.87 34.89,18.91 U2.29 ; U3.3 26.64,13.6 27.22,13.02 v1(29.8,13.02) ; U4.3 34.08,13.66 v1(35.38,13.66) 36.5,14.77 v1(36.5,17.53)
  BOTTOM w0.127: v1(35.38,13.66) 32.86,13.66 32.22,13.02 v1(29.8,13.02) ; v1(36.5,17.53) v1(34.63,17.53)
TXD0: length 60.9
  TOP w0.127: v1(43.6,14.38) 45.84,14.38 46.09,14.64 R3.2 ; v1(43.6,39.65) 42.84,40.41 14.81,40.41 13.95,41.27 J44.2
  BOTTOM w0.127: v1(43.6,39.65) v1(43.6,14.38)
N16845223: length 2.6
  TOP w0.127: v1(19.52,15.63) 19.16,15.27 R25.1
  BOTTOM w0.127: U9.2 18.33,15.08 18.33,15.41 18.55,15.63 v1(19.52,15.63)
N16845246: length 18.2
  SIG w0.127: v1(19.44,16.34) 19.44,28.67 v1(17.6,30.52)
  BOTTOM w0.127: v1(17.6,30.52) 15.98,30.52 15.63,30.17 D5.2 ; U9.6 v1(19.44,16.34)
N16845248: length 1.1
  BOTTOM w0.381: D5.1 R24.1
N16845297: length 4.9
  BOTTOM w0.381: D6.2 15.74,15.92 16.59,15.07 U9.3
N16845299: length 1.7
  BOTTOM w0.381: R30.1 18.76,18.52 18.75,18.53 D6.1
N16845342: length 1.9
  BOTTOM w0.127: R31.1 18.54,17.34 18.34,17.14 U9.5
N16860839: length 6
  TOP w0.127: C5.1 41.91,27.02 C6.2 R1.2 39.67,27.02 39.51,26.86 39.51,26 39.5,25.99 39.5,25.69 38.39,24.57 U2.48
N16860948: length 7
  TOP w0.203: C21.1 L5.1 35.67,29.6 35.66,29.59 35.66,26.43 36.49,25.6 U2.4 U2.3
N16861170: length 4.1
  TOP w0.635: R14.2 39.89,28.82 R15.1 C15.2 37.3,28.81 C14.2
N16861179: length 8.8
  TOP w0.127: U1.3 44.31,20.08 43.43,20.96 42.36,20.96 40.89,22.43 39.45,22.43 38.91,22.97 U2.44
  TOP w0.254: C2.1 44.3,19.97 U1.3
N16861214: length 3.6
  TOP w0.127: R2.1 41.7,22.18 U1.1
  TOP w0.254: C1.1 42.76,22.22 U1.1
N16861260: length 4.1
  TOP w0.127: U2.47 38.46,24.17 39.76,25.48 39.76,25.59 R1.1 C6.1
N16861530: length 10.8
  TOP w0.127: U2.41 38.93,21.77 42.98,17.73 45.62,17.73 46.09,17.25 R3.1
N16861598: length 2
  TOP w0.127: R2.2 39.35,22.91 38.88,23.37 U2.45
N16861944: length 3.6
  TOP w0.635: J39.1 40.8,31.02 40.79,31.01 R14.1
N16863419: length 2.7
  TOP w0.635: L6.1 42.8,28.81 C43.2 R15.2
N16863538: length 2.6
  TOP w0.635: TP5.1 46.97,28.81 C44.2 L6.2
N16884685: length 2.8
  TOP w0.203: U2.2 L4.1
  TOP w0.635: C14.1 L4.1
N16908427: length 1.3
  BOTTOM w0.254: R70.2 23.32,33.92 Q2.1
N16908429: length 1.5
  BOTTOM w0.254: Q1.1 29.12,33.91 29.13,33.92 R21.2

## Copper pours and planes (outline as drawn; the poured copper is in the pictures)
AGND on GND: 25.09,33.45 23.6,33.45 19.14,29 19.14,22.46 18.64,21.96 15.8,21.96 15.63,21.79 15.63,20.39 16.71,19.31 22.34,19.31 27.35,14.31 27.35,12.25 27.65,11.95 28.51,11.95 28.73,12.17 28.73,15.44 21.42,22.75 21.42,27.7 25.11,31.38 25.11,33.43
GND on TOP: 0.13,25 49.87,25 ; 10 cut-outs
GND on BOTTOM: 0.13,25 49.87,25 ; 4 cut-outs
GND on GND: 0.13,25 49.87,25
DOVDD_3V3 on SIG: 0.13,25 49.87,25 ; 4 cut-outs

## Text on the board
Ref Des/Silkscreen Bottom: IO12 | GND | IO16 | 3.3V | RTS | DTR | IO14 | TXD0 | IO2 | RXD0 | IO15 | IO13 | IO0 | 5V
Ref Des/Silkscreen Top: FUN | RST | FLSH
NCLEGEND-1-4: FIGURE | SIZE | 0.3048 | 0.508 | 0.635 | 0.9 | DRILL CHART: TOP to BOTTOM | ALL UNITS ARE IN MILLIMETERS | PLATED | QTY | 100 | 224 | 2 | 19
